# Altium PCB WS2812B.PcbDoc
Units mm, origin at the board's own origin, x right, y up, seen from the top; angles counter-clockwise.
Board outline 100 x 100 mm, 2 copper layers (Top Layer, Bottom Layer); 69 components, 50 nets, 227 pads, 31 vias.
Unrouted connection lines stored in the file: 93.
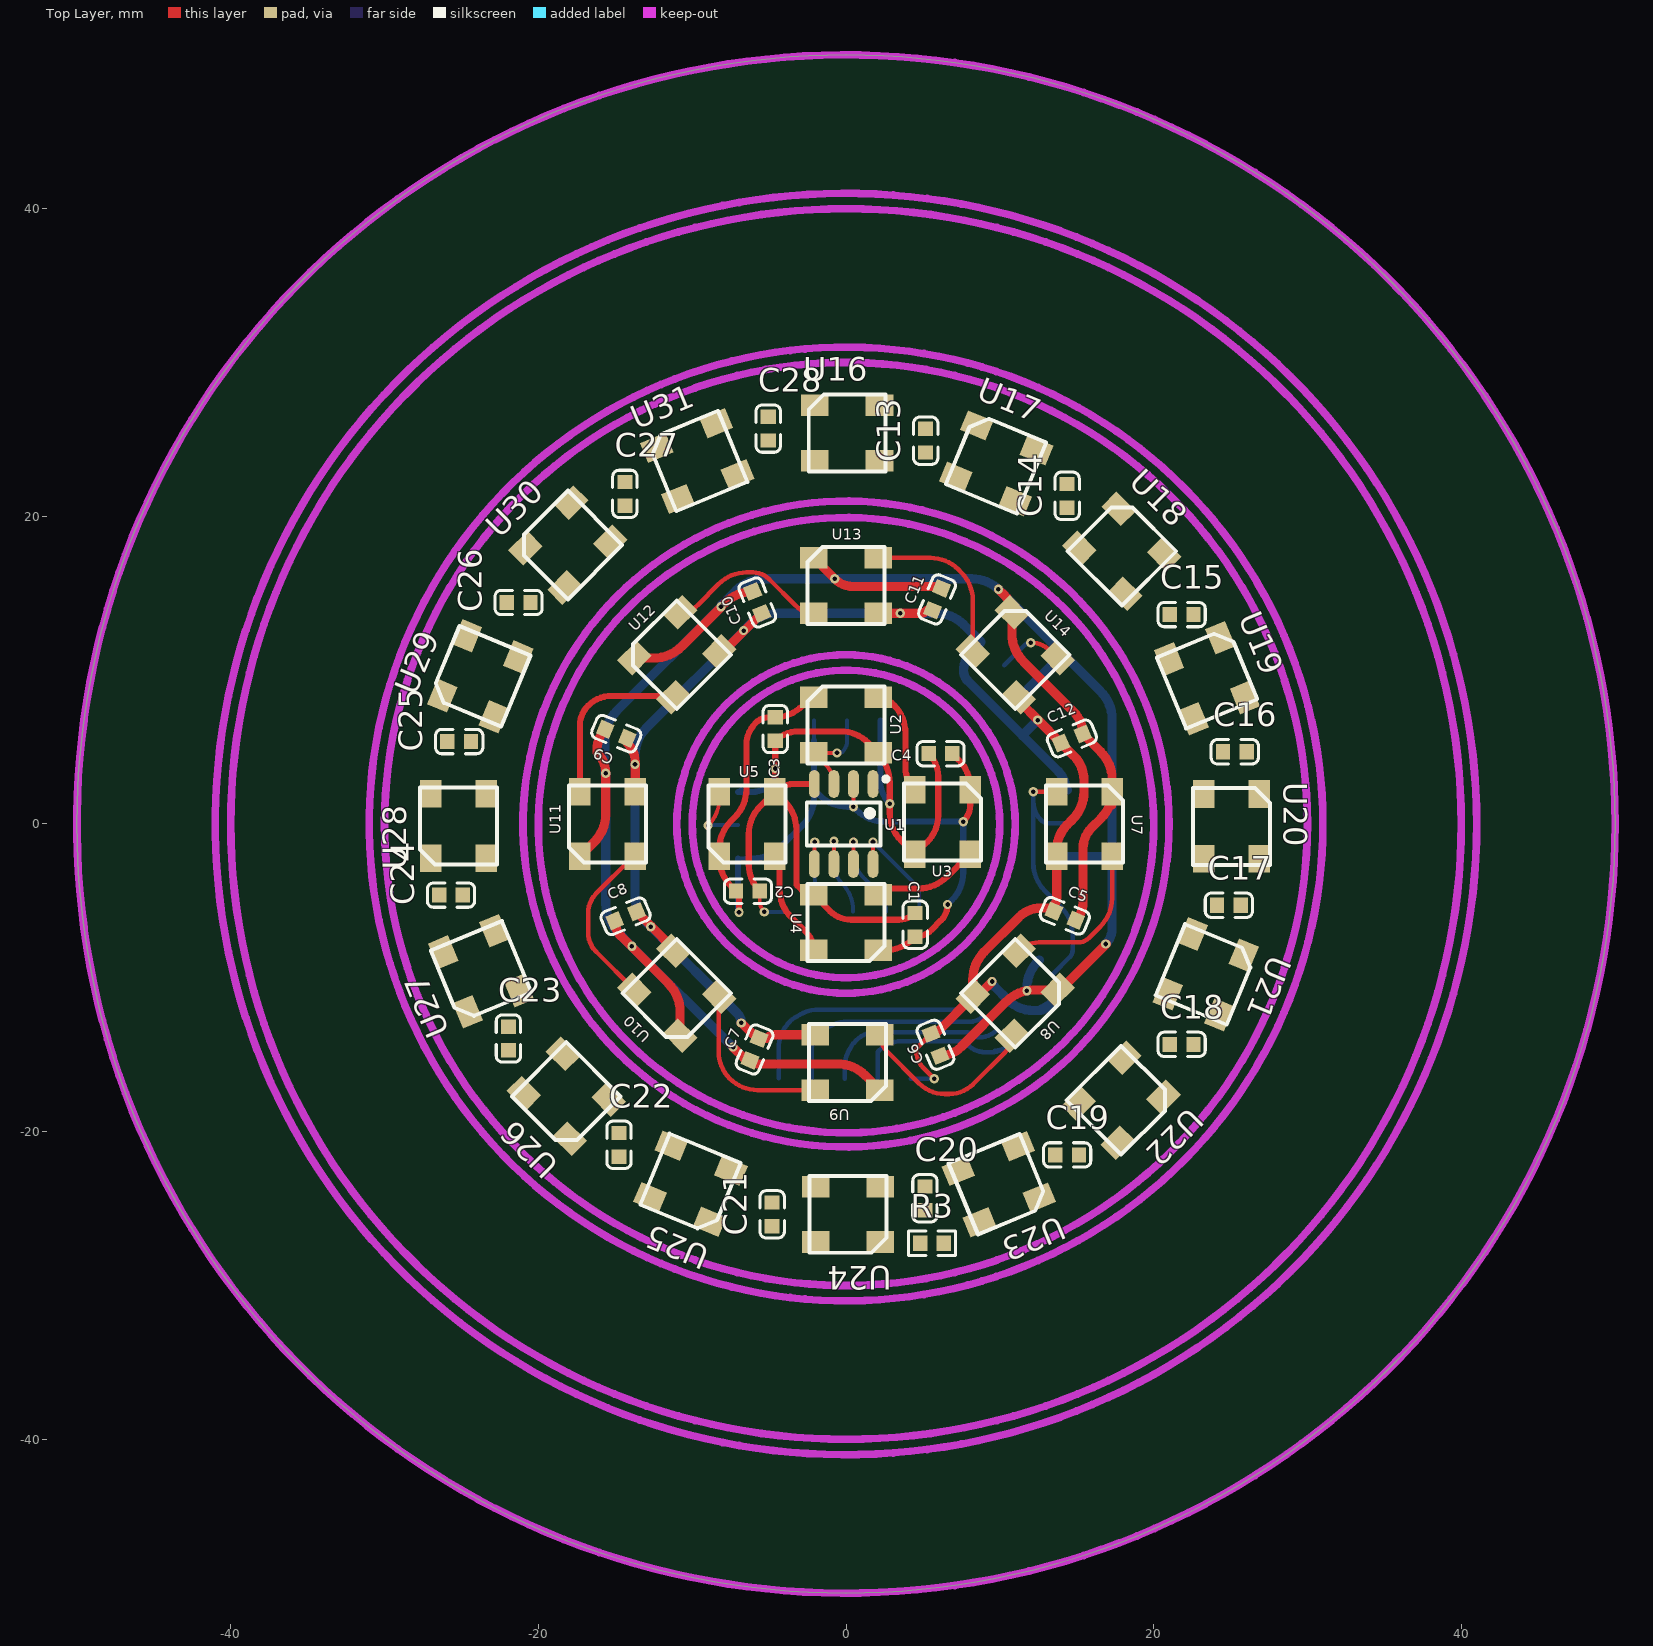
[diagram p0: Top Layer view]
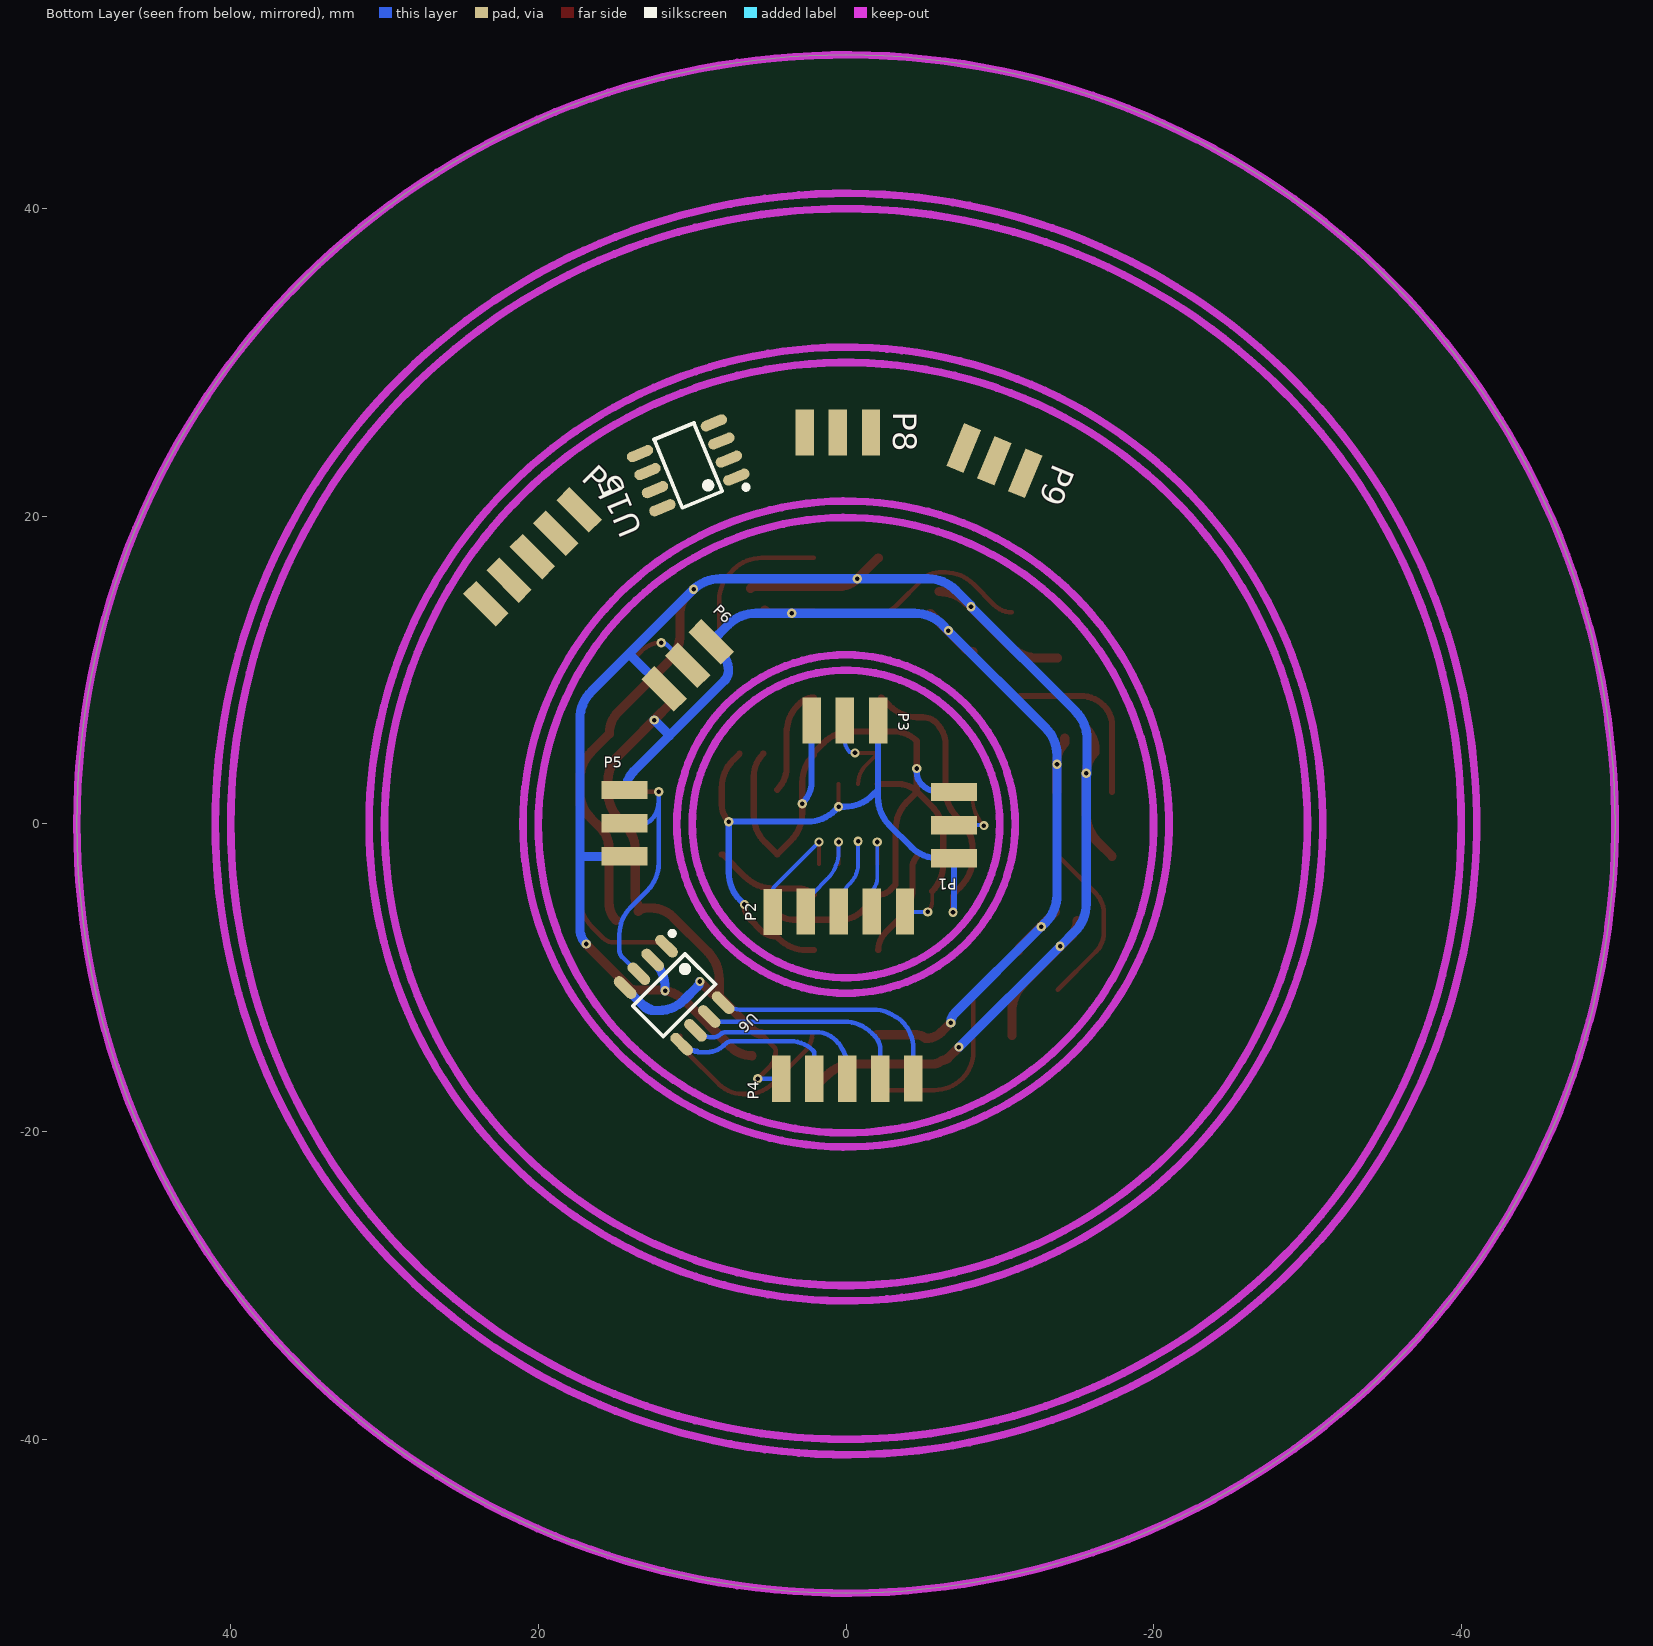
[diagram p1: Bottom Layer view, seen from below]

## Layer stack, top to bottom
Top Solder: solder mask 0.0102, Solder Resist, Dk 3.5
Top Layer: signal copper 0.0356
Dielectric 1: dielectric 0.32, FR-4, Dk 4.8
Bottom Layer: signal copper 0.0356
Bottom Solder: solder mask 0.0102, Solder Resist, Dk 3.5

## Board outline
-50,0 ccw(c0,0) 0,-50 ccw(c0,0) 50,0 ccw(c0,0) 0,50 ccw(c0,0)

## Design rules (kind name [scope] priority, off if disabled: settings)
Clearance [All] p1: gap=0.254
ComponentClearance [All] p1: gap=0 collisioncheckmode=3 verticalgap=0 showdistances=FALSE
PolygonConnect [All] p1: connectstyle=Relief reliefconductorwidth=0.254 reliefentries=4 polygonreliefangle="90 Angle" airgapwidth=0.254
RoutingVias [All] p1: holewidth=0.711 width=1.27 viastyle="Through Hole" minholewidth=0.3 minwidth=0.3 maxholewidth=3 maxwidth=3
SolderMaskExpansion [All] p1: expansion=0.102
UnpouredPolygon [All] p1: allowunpoured=FALSE
Width [All] p1: maxlimit=3 minlimit=0.254 preferedwidth=0.254 minimp=50.000000 maximp=50.000000 favimp=50.000000
28 further rules are at their usual default settings.

## Components (designator, comment, footprint, x,y, rotation, side; value= is the part's Value field where it differs from the comment)
C1 "100nF (104) 10% 50V" 0603_C 4.496,-6.553 r270 top
C2 "100nF (104) 10% 50V" 0603_C -6.375,-4.369 r180 top
C3 "100nF (104) 10% 50V" 0603_C -4.597,6.172 r90 top
C4 "100nF (104) 10% 50V" 0603_C 6.147,4.572 r0 top
C5 "100nF (104) 10% 50V" 0603_C 14.224,-5.969 r337.5 top
C6 "100nF (104) 10% 50V" 0603_C 5.817,-14.351 r292.5 top
C7 "100nF (104) 10% 50V" 0603_C -5.944,-14.656 r247.5 top
C8 "100nF (104) 10% 50V" 0603_C -14.326,-5.994 r202.5 top
C9 "100nF (104) 10% 50V" 0603_C -14.935,5.867 r157.5 top
C10 "100nF (104) 10% 50V" 0603_C -5.766,14.402 r112.5 top
C11 "100nF (104) 10% 50V" 0603_C 5.918,14.605 r67.5 top
C12 "100nF (104) 10% 50V" 0603_C 14.681,5.563 r22.5 top
C13 "100nF (104) 10% 50V" 0603_C 5.182,24.917 r90 top
C14 "100nF (104) 10% 50V" 0603_C 14.376,21.336 r90 top
C15 "100nF (104) 10% 50V" 0603_C 21.819,13.614 r0 top
C16 "100nF (104) 10% 50V" 0603_C 25.273,4.699 r0 top
C17 "100nF (104) 10% 50V" 0603_C 24.892,-5.283 r0 top
C18 "100nF (104) 10% 50V" 0603_C 21.819,-14.326 r0 top
C19 "100nF (104) 10% 50V" 0603_C 14.376,-21.514 r0 top
C20 "100nF (104) 10% 50V" 0603_C 5.131,-24.333 r90 top
C21 "100nF (104) 10% 50V" 0603_C -4.801,-25.375 r90 top
C22 "100nF (104) 10% 50V" 0603_C -14.757,-20.853 r90 top
C23 "100nF (104) 10% 50V" 0603_C -21.946,-13.945 r90 top
C24 "100nF (104) 10% 50V" 0603_C -25.679,-4.623 r180 top
C25 "100nF (104) 10% 50V" 0603_C -25.146,5.359 r180 top
C26 "100nF (104) 10% 50V" 0603_C -21.285,14.402 r180 top
C27 "100nF (104) 10% 50V" 0603_C -14.376,21.463 r90 top
C28 "100nF (104) 10% 50V" 0603_C -5.055,25.705 r90 top
P1 "Header 3" PIN3_SMT -6.985,-2.261 r0 bottom
P2 "Header 5" PIN5_SMT -3.835,-5.69 r270 bottom
P3 "Header 3" PIN3_SMT -2.108,6.706 r270 bottom
P4 "Header 5" PIN5_SMT 4.216,-16.561 r90 bottom
P5 "Header 3" PIN3_SMT 14.376,2.235 r180 bottom
P6 "Header 3" PIN3_SMT 8.738,11.836 r225 bottom
P7 "Header 5" PIN5_SMT 17.348,20.422 r225 bottom
P8 "Header 3" PIN3_SMT -1.651,25.425 r270 bottom
P9 "Header 3" PIN3_SMT -11.659,22.758 r292.5 bottom
R3 "0Ω (0R0) ±1%" 0603_R 5.588,-27.254 r0 top
U1 "STC8F1K08S2" SOP-8_150mil -0.152,0 r180 top
U2 "WS2812B_5050R" SW2812B_5050RGB 0,6.426 r0 top
U3 "WS2812B_5050R" SW2812B_5050RGB 6.274,0.127 r270 top
U4 "WS2812B_5050R" SW2812B_5050RGB 0,-6.401 r180 top
U5 "WS2812B_5050R" SW2812B_5050RGB -6.426,0 r90 top
U6 "STC8F1K08S2" SOP-8_150mil 11.176,-11.125 r315 bottom
U7 "WS2812B_5050R" SW2812B_5050RGB 15.5,0 r270 top
U8 "WS2812B_5050R" SW2812B_5050RGB 11,-11 r225 top
U9 "WS2812B_5050R" SW2812B_5050RGB 0.102,-15.5 r180 top
U10 "WS2812B_5050R" SW2812B_5050RGB -11,-11 r135 top
U11 "WS2812B_5050R" SW2812B_5050RGB -15.5,0 r90 top
U12 "WS2812B_5050R" SW2812B_5050RGB -11,11 r45 top
U13 "WS2812B_5050R" SW2812B_5050RGB 0,15.5 r0 top
U14 "WS2812B_5050R" SW2812B_5050RGB 11,11 r315 top
U15 "STC8F1K08S2" SOP-8_150mil 10.262,23.317 r67.5 bottom
U16 "WS2812B_5050R" SW2812B_5050RGB 0.076,25.425 r0 top
U17 "WS2812B_5050R" SW2812B_5050RGB 9.754,23.444 r337.5 top
U18 "WS2812B_5050R" SW2812B_5050RGB 17.932,17.729 r315 top
U19 "WS2812B_5050R" SW2812B_5050RGB 23.47,9.474 r292.5 top
U20 "WS2812B_5050R" SW2812B_5050RGB 25.07,-0.152 r270 top
U21 "WS2812B_5050R" SW2812B_5050RGB 23.393,-9.779 r247.5 top
U22 "WS2812B_5050R" SW2812B_5050RGB 17.882,-17.958 r225 top
U23 "WS2812B_5050R" SW2812B_5050RGB 9.931,-23.419 r202.5 top
U24 "WS2812B_5050R" SW2812B_5050RGB 0.127,-25.375 r180 top
U25 "WS2812B_5050R" SW2812B_5050RGB -10.109,-23.393 r157.5 top
U26 "WS2812B_5050R" SW2812B_5050RGB -18.186,-17.704 r135 top
U27 "WS2812B_5050R" SW2812B_5050RGB -23.724,-9.576 r112.5 top
U28 "WS2812B_5050R" SW2812B_5050RGB -25.197,-0.127 r90 top
U29 "WS2812B_5050R" SW2812B_5050RGB -23.774,9.601 r67.5 top
U30 "WS2812B_5050R" SW2812B_5050RGB -18.085,18.136 r45 top
U31 "WS2812B_5050R" SW2812B_5050RGB -9.677,23.597 r22.5 top

## Footprints (in the part's own frame and the unit in brackets; to place one, negate y for a bottom-side part, rotate by r counter-clockwise, add the part's x,y. Pads: shape width x height; smd on the part's side, far side on the other; paste and mask are expansions set on the pad)
0603_C [mm]
  rect 0.93x0.98 smd: 1(-0.77,0) 2(0.77,0)
  silkscreen extent -1.53,-0.79 1.54,0.79, body extent -0.8,-0.4 0.8,0.4, height 0.3
0603_R [mm]
  rect 0.93x0.98 smd: 1(-0.77,0) 2(0.77,0)
  silkscreen extent -1.53,-0.79 1.54,0.79, body extent -0.85,-0.4 0.85,0.4, height 0.56
PIN3_SMT [mm]
  rect 3x1.2 smd: 1(-0.025,-0.025) 2(-0.025,-2.183) 3(-0.025,-4.342)
PIN5_SMT [mm]
  rect 3x1.2 smd: 1(0,0) 2(0,-2.15) 3(0,-4.3) 4(0,-6.45) 5(0.025,-8.6)
SOP-8_150mil [mm]
  oval 0.7x1.8 smd: 1(-1.905,-2.6) 2(-0.635,-2.6) 3(0.635,-2.6) 4(1.905,-2.6) 5(1.905,2.6) 6(0.635,2.6) 7(-0.635,2.6) 8(-1.905,2.6)
  silkscreen extent -2.9,-3.07 2.4,1.4, body extent -2.5,-3.1 2.5,3.1, height 1.75
SW2812B_5050RGB [mm]
  rect 1.8x1.4 smd: 1(-2.1,1.8) 2(-2.1,-1.8) 3(2.1,-1.8) 4(2.1,1.8)
  silkscreen extent -2.5,-2.5 2.5,2.5

## Part data
C1 C2 C3 C4 C5 C6 C7 C8 C9 C10 C11 C12 C13 C14 C15 C16 C17 C18 C19 C20 C21 C22 C23 C24 C25 C26 C27 C28: library part "0603 100nF (104) 10% 50V", "贴片电容"
P1 P3 P5 P6 P8 P9: "Header, 3-Pin"
P2 P4 P7: "Header, 5-Pin"
R3: library part "0603 0Ω (0R0) 1%", "贴片电阻"
U1 U6 U15: library part STC8F1K08S2_SOP8
U2 U3 U4 U5 U7 U8 U9 U10 U11 U12 U13 U14 U16 U17 U18 U19 U20 U21 U22 U23 U24 U25 U26 U27 U28 U29 U30 U31: library part WS2812B_5050RGB

## Via types
v1: diameter 0.6, hole 0.3, Top Layer to Bottom Layer, tented both sides, 31 vias

## Nets (pads, with @x,y where several pads share a name; then routed paths per layer and width w, separated by ;. In a path a pad name is that pad's centre, name@x,y a point inside that pad or via, vN(x,y) a via of type N, cw(c..) or ccw(c..) an arc to the next point about the centre after c; other vN are vias at no path point)
D2_2: R3.1 U15.1 U24.2
GND: C1.1 C2.1 C3.1 C4.1 P1.3 P2.1 P3.3 U1.4 U2.3 U3.3 U4.3 U5.3 | length 62.7
  Top Layer w0.254: C2.1 -5.605,-4.998 ccw(c-4.592,-4.998) v1(-5.309,-5.715)
  Top Layer w0.4: C2.1 cw(c-3.869,-2.632) -6.325,-2.632 -6.325,-0.651 cw(c-3.785,-0.651) -5.581,1.146 U5.3 ; U1.4 -3.419,2.6 ccw(c-3.419,0.893) U5.3 ; U2.3@2.1,4.496 U2.3 1.45,5.276 ccw(c-0.346,3.48) -0.346,6.02 -3.106,6.02 ccw(c-3.106,3.911) C3.1 v1(-4.597,3.607) -4.597,2.17 cw(c-4.696,2.17) U5.3 ; U2.3@2.101,4.495 cw(c0.305,2.699) 2.845,2.699 v1(2.845,1.321) 2.845,0.708 ccw(c5.385,0.708) 3.589,-1.088 U3.3 5.28,-1.167 ccw(c3.553,0.559) 5.994,0.559 5.994,3.081 ccw(c3.886,3.081) C4.1 ; C1.1 cw(c3.434,-4.721) 3.434,-6.223 0.33,-6.223 cw(c0.33,-4.272) -1.049,-5.652 U4.3 cw(c-2.1,-3.485) -2.889,-4.274 -3.15,-4.013 cw(c-2.966,-3.829) -3.226,-3.829 -3.226,-0.353 ccw(c-5.766,-0.353) -3.97,1.444 U5.3
  Bottom Layer w0.254: P1.3 P1.3@-6.818,2.273 ; v1(-5.309,-5.715) -3.897,-5.715 ccw(c-3.897,-5.628) P2.1 ; P3.3 P3.3@2.253,6.711 ; v1(2.845,1.321) 2.91,1.386 cw(c2.997,1.3) v1@2.997,1.422
  Bottom Layer w0.4: P1.3 -6.097,2.081 ccw(c-6.097,3.735) -4.928,2.565 ccw(c-5.725,3.363) -4.597,3.363 v1(-4.597,3.607) ; P3.3 2.233,2.797 ccw(c4.321,2.797) v1(2.845,1.321)
GND1: C5.1 C6.1 C7.1 C8.1 C9.1 C10.1 C11.1 C12.1 P4.1 P5.1 P6.1 U6.4 U7.3 U8.3 U9.3 U10.3 U11.3 U12.3 U13.3 U14.3 | length 123.8
  Top Layer w0.3: 4.691,-14.471 ccw(c4.977,-14.757) 4.572,-14.757 ccw(c6.105,-14.757) 5.021,-15.841 v1(5.74,-16.561) ; 4.691,-14.471 C6.1
  Top Layer w0.6: C9.1 -14.224,5.275 cw(c-15.488,4.01) v1@-13.7,4.01 ; U11.3 v1@-13.7,3.886 ; C8.1 v1@-12.667,-6.647 ; v1(-12.7,-6.68) v1@-12.667,-6.647 ; U10.3 ccw(c-11.551,-8.242) -11.311,-8.002 v1@-12.667,-6.647 ; U12.3 ccw(c-8.242,11.919) U12.3@-7.743,11.419 ; U12.3@-7.742,11.419 C10.1 ; v1(-6.807,-12.929) -6.228,-13.508 ccw(c-5.173,-12.452) -5.173,-13.944 cw(c-4.583,-14.534) -4.583,-13.7 U9.3 ; U13.3 v1(3.531,13.7) 4.808,13.7 ccw(c4.808,14.361) C11.1@5.275,13.894 ; C6.1 ccw(c5.522,-12.933) 6.022,-13.433 U8.3 ; v1(9.5,-10.236) 8.723,-11.013 cw(c8.242,-10.533) U8.3 ; U14.3 ccw(c11.735,8.242) 11.365,7.872 v1@12.476,6.761 ; v1(12.471,6.756) v1@12.476,6.761 ; C5.1 ccw(c12.998,-6.189) 12.998,-5.461 12.675,-5.461 ccw(c12.675,-7.485) 11.244,-6.054 8.986,-8.311 ccw(c10.782,-10.107) 8.242,-10.107 U8.3 ; C5.1@13.513,-5.275 ccw(c13.06,-4.823) 13.7,-4.823 U7.3 13.7,-1.684 cw(c16.009,-1.684) 14.376,-0.051 14.725,0.297 ccw(c12.929,2.094) 15.469,2.094 15.469,2.845 ccw(c13.237,2.845) 14.815,4.423 C12.1 v1@12.476,6.761
  Bottom Layer w0.3: P4.1 v1(5.74,-16.561)
  Bottom Layer w0.6: v1(-6.807,-12.929) ccw(c-7.666,-12.929) -7.059,-12.322 v1(-12.7,-6.68) -12.972,-6.408 cw(c-11.176,-4.612) -13.716,-4.612 v1(-13.716,3.886) -13.716,4.46 cw(c-11.176,4.46) -12.972,6.256 v1(-6.655,12.573) -6.272,12.956 cw(c-4.476,11.16) -4.476,13.7 v1(3.531,13.7) 5.857,13.7 cw(c5.857,11.16) 7.653,12.956 P6.1 8.177,11.241 ccw(c9.461,9.957) 7.645,9.957 ccw(c8.565,9.957) 7.915,9.306 11.481,5.74 ; 10.528,-11.443 9.669,-10.583 ; 10.529,-11.443 ccw(c12.186,-9.785) 12.186,-12.129 12.503,-12.129 ; v1(12.471,6.756) 11.499,5.784 ccw(c11.542,5.74) 11.481,5.74 ; U6.4 13.471,-11.524 ; P5.1 14.3,2.21 ccw(c12.584,2.21) 13.798,3.424 11.481,5.74 ; 9.669,-10.583 cw(c10.016,-10.236) 9.525,-10.236 ccw(c10.016,-10.236) 9.669,-10.583 ; 12.503,-12.129 ccw(c12.503,-11.254) 13.122,-11.873 13.471,-11.524 ; 12.503,-12.129 ccw(c11.675,-9.728) 13.471,-11.524
GND2: C13.1 C14.1 C15.1 C16.1 C17.1 C18.1 C19.1 C20.1 C21.1 C22.1 C23.1 C24.1 C25.1 C26.1 C27.1 C28.1 P7.1 P8.1 P9.1 U15.4 U16.3 U17.3 U18.3 U19.3 U20.3 U21.3 U22.3 U23.3 U24.3 U25.3 U26.3 U27.3 U28.3 U29.3 U30.3 U31.3
NetP1_2: P1.2 U5.4 | length 4.4
  Top Layer w0.254: v1(-8.966,-0.102) ccw(c-10.753,1.685) -8.226,1.685 U5.4
  Bottom Layer w0.254: v1(-8.966,-0.102) cw(c-8.907,-0.16) -8.907,-0.077 P1.2
NetP3_2: P3.2 U1.3 U2.2 | length 6.5
  Top Layer w0.254: U2.2 U2.2@-2.097,4.623 ; U1.3 ccw(c-2.51,2.6) -1.292,3.818 U2.2@-2.097,4.623 ; v1(-0.584,4.623) U2.2@-2.097,4.623
  Bottom Layer w0.254: v1(-0.584,4.623) -0.453,4.623 ccw(c-0.453,4.796) -0.33,4.674 -0.29,4.674 ccw(c-0.29,4.76) -0.229,4.699 ccw(c-0.962,5.432) 0.075,5.432 P3.2
NetP5_2: P5.2 U6.3 U7.2 | length 17.8
  Top Layer w0.3: v1(12.175,2.1) U7.2
  Bottom Layer w0.3: v1(12.175,2.1) 12.175,1.461 ; U6.3 14.528,-8.671 ccw(c14.036,-8.179) 14.732,-8.179 14.732,-7.189 ccw(c12.217,-7.189) 13.995,-5.41 12.919,-4.334 cw(c14.715,-2.537) 12.175,-2.537 12.175,1.461 ; P5.2 13.163,0.052 cw(c13.163,0.742) 12.675,0.254 cw(c13.881,1.461) 12.175,1.461
NetP6_2: P6.2 U14.4 | length 4.4
  Top Layer w0.3: v1(12.014,11.786) cw(c12.014,9.985) 13.287,11.258 U14.4
  Bottom Layer w0.3: P6.2 11.605,11.616 cw(c12.014,11.207) v1(12.014,11.786)
NetP8_2: P8.2 U15.3 U16.2
NetP9_2: P9.2 U31.4
NetR3_2: R3.2 U23.4
NetU2_4: U2.4 U3.2 | length 7
  Top Layer w0.4: U2.4 cw(c2.1,6.972) 2.987,7.859 3.117,7.729 cw(c1.321,5.933) 3.861,5.933 3.861,3.707 ccw(c5.954,3.707) U3.2
NetU3_4: U3.4 U4.2 | length 7
  Top Layer w0.254: U4.2 U4.2@2.198,-4.503
  Top Layer w0.4: U4.2 cw(c3.089,-5.59) 3.089,-4.191 4.739,-4.191 ccw(c4.739,-1.651) 6.535,-3.447 U3.4@7.964,-2.019 ; U3.4@7.964,-2.018 cw(c8.074,-2.129) U3.4
NetU4_4: U4.4 U5.2 | length 6.9
  Top Layer w0.4: U5.2 cw(c-5.37,-2.844) -4.318,-2.844 -4.318,-4.256 ccw(c-1.778,-4.256) -3.574,-6.053 -2.577,-7.05 ; -2.576,-7.05 cw(c-3.728,-8.201) U4.4
NetU7_4: U7.4 U8.2 | length 10.6
  Top Layer w0.3: U8.2 cw(c12.53,-9.561) 12.53,-7.696 15.099,-7.696 ccw(c15.099,-6.742) 15.773,-7.417 16.556,-6.634 ccw(c14.76,-4.838) 17.3,-4.838 U7.4
NetU8_4: U8.4 U9.2 | length 12.2
  Top Layer w0.3: U9.2 ccw(c3.654,-13.7) 2.627,-14.727 4.775,-16.875 ccw(c6.408,-15.242) 6.408,-17.551 6.706,-17.551 ccw(c6.706,-15.344) 8.267,-16.905 10.345,-14.826 ccw(c9.277,-13.758) U8.4
NetU9_4: U9.4 U10.2 | length 13.3
  Top Layer w0.3: U10.2 ccw(c-8.15,-11.304) -8.28,-11.304 -8.28,-14.789 ccw(c-5.782,-14.789) -7.55,-16.555 ; U9.4 -5.752,-17.3 ; -7.55,-16.555 ccw(c-5.782,-14.789) -7.549,-16.556 ; -7.55,-16.555 -7.549,-16.556 ; -7.549,-16.556 ccw(c-5.753,-14.76) -5.753,-17.3 ; -7.549,-16.556 ccw(c-5.752,-14.76) -5.752,-17.3
NetU10_4: U10.4 U11.2 | length 11.1
  Top Layer w0.3: U10.4 -16.255,-8.291 cw(c-15.025,-7.061) -16.764,-7.061 -16.764,-5.773 cw(c-15.03,-5.773) -16.256,-4.547 -13.887,-2.177 cw(c-13.7,-2.364) U11.2
NetU11_4: U11.4 U12.2 | length 11.5
  Top Layer w0.4: U11.4 -17.3,6.402 cw(c-15.47,6.402) -16.764,7.696 cw(c-15.231,6.163) -15.231,8.331 -11.427,8.331 cw(c-11.427,8.028) U12.2
NetU12_4: U12.4 U13.2 | length 10.6
  Top Layer w0.3: U12.4 ccw(c-10.788,15.374) -9.645,14.231 -8.262,15.614 cw(c-6.466,13.818) -6.466,16.358 -6.046,16.358 cw(c-6.046,14.883) -5.004,15.926 -3.257,14.179 ccw(c-2.1,15.337) U13.2
NetU13_4: U13.4 U14.2 | length 11
  Top Layer w0.3: U13.4 5.498,17.3 cw(c5.498,14.76) 7.295,16.556 7.498,16.352 cw(c5.702,14.556) 8.001,15.637 cw(c5.702,14.556) 8.242,14.556 U14.2
NetU16_4: U16.4 U17.2
NetU17_4: U17.4 U18.2
NetU18_4: U18.4 U19.2
NetU19_4: U19.4 U20.2
NetU20_4: U20.4 U21.2
NetU21_4: U21.4 U22.2
NetU22_4: U22.4 U23.2
NetU24_4: U24.4 U25.2
NetU25_4: U25.4 U26.2
NetU26_4: U26.4 U27.2
NetU27_4: U27.4 U28.2
NetU28_4: U28.4 U29.2
NetU29_4: U29.4 U30.2
NetU30_4: U30.4 U31.2
RXD: P2.2 U1.5 | length 4.7
  Top Layer w0.254: U1.5 -2.057,-1.23 cw(c-1.971,-1.23) v1(-2.032,-1.168)
  Bottom Layer w0.254: v1(-2.032,-1.168) -2.032,-3.507 ccw(c-0.849,-3.507) P2.2@-1.685,-4.343
RXD1: P4.2 U6.5 | length 12
  Bottom Layer w0.3: P4.2 2.066,-14.894 cw(c2.296,-14.894) 2.134,-14.732 cw(c3.605,-16.204) 3.605,-14.122 7.455,-14.122 cw(c7.455,-14.643) 7.823,-14.275 7.915,-14.367 ccw(c9.042,-13.239) 8.179,-14.58 ccw(c9.042,-13.239) 9.042,-14.834 9.422,-14.834 ccw(c9.422,-13.048) U6.5 cw(c9.667,-13.294) 9.667,-14.732
RXD2: P7.2 U15.5
SCL: P2.4 U1.7 | length 7
  Top Layer w0.254: U1.7 v1(0.483,-1.168) ; v1(0.483,-1.168) ccw(c0.421,-1.107) 0.508,-1.107 0.508,-1.016 ccw(c0.569,-1.077) 0.483,-1.077 v1(0.483,-1.168)
  Bottom Layer w0.254: v1(0.483,-1.168) 0.483,-1.793 ccw(c3.023,-1.793) 1.227,-3.589 2.111,-4.473 cw(c0.894,-5.69) P2.4
SCL1: P4.4 U6.7 | length 14
  Bottom Layer w0.3: P4.4 -2.234,-14.683 cw(c-0.938,-14.683) -1.854,-13.767 -1.684,-13.596 cw(c0.112,-15.392) 0.112,-12.852 8.073,-12.852 ccw(c8.073,-11.699) U6.7
SCL2: P7.4 U15.7
SDA: P2.5 U1.8 | length 7.2
  Top Layer w0.254: U1.8 v1(1.753,-1.168)
  Bottom Layer w0.254: v1(1.753,-1.168) 4.649,-4.065 cw(c4.371,-4.343) 4.765,-4.343 P2.5
SDA1: P4.5 U6.8 | length 15.8
  Bottom Layer w0.3: P4.5 -4.384,-14.631 cw(c-1.844,-14.631) -3.952,-13.215 cw(c-1.844,-14.631) -3.64,-12.834 -3.607,-12.802 cw(c-2.626,-13.783) -3.202,-12.521 cw(c-1.751,-14.605) -1.751,-12.065 4.29,-12.065 6.908,-12.065 ccw(c6.908,-10.534) U6.8
SDA2: P7.5 U15.8
TXD: P2.3 U1.6 | length 6.4
  Top Layer w0.254: U1.6 v1(-0.787,-1.118)
  Bottom Layer w0.254: v1(-0.787,-1.118) -0.787,-2.609 ccw(c0.947,-2.609) -0.279,-3.835 cw(c-2.075,-5.632) 0.465,-5.632 P2.3
TXD1: P4.3 U6.6 | length 12.2
  Bottom Layer w0.3: P4.3 -0.084,-15.86 cw(c2.456,-15.86) 0.66,-14.064 ; 0.661,-14.063 cw(c1.929,-15.331) 1.929,-13.538 7.847,-13.538 cw(c7.847,-13.972) 8.153,-13.665 ccw(c8.644,-13.175) 8.644,-13.868 8.686,-13.868 ccw(c8.686,-12.313) U6.6
TXD2: P7.3 U15.6
VCC: C1.2 C2.2 C3.2 C4.2 P1.1 P3.1 U1.2 U2.1 U3.1 U4.1 U5.1 | length 61.9
  Top Layer w0.254: U2.1@-2.388,8.099 U2.1@-2.151,8.099 ; v1(0.483,1.118) 0.483,1.016 U1.2
  Top Layer w0.4: U5.1@-8.226,-1.582 U5.1@-8.226,-1.395 ; v1(-6.96,-5.74) -6.96,-4.817 ccw(c-7.594,-4.817) C2.2 -7.482,-4.032 cw(c-5.686,-2.236) -8.226,-2.236 U5.1 -8.226,-1.608 cw(c-5.686,-1.608) -7.482,0.189 -7.221,0.45 ccw(c-9.017,2.246) -6.477,2.246 -6.477,5.107 cw(c-4.396,5.107) -5.867,6.579 cw(c-4.99,5.701) -4.99,6.942 -4.628,6.942 ccw(c-4.628,9.482) C3.2 ccw(c-4.628,9.482) -2.832,7.686 U2.1@-2.292,8.226 ; U4.1 2.566,-8.201 ccw(c2.566,-5.661) 4.362,-7.457 C1.2 ccw(c4.496,-5.809) 5.566,-6.88 6.173,-6.273 ccw(c5.132,-5.232) 6.477,-5.83 ccw(c5.132,-5.232) v1(6.604,-5.232) ; C4.2 7.33,4.159 cw(c5.534,2.363) 8.074,2.363 U3.1 8.074,1.248 cw(c6.524,1.248) v1(7.62,0.152)
  Bottom Layer w0.254: P1.1 P1.1@-6.477,-2.236 ; P3.1@-2.083,5.423 P3.1
  Bottom Layer w0.4: P1.1 -7.01,-5.619 ccw(c-6.838,-5.619) v1(-6.96,-5.74) ; P1.1@-6.477,-2.236 -6.031,-2.236 ccw(c-6.031,0.304) -4.235,-1.492 -2.827,-0.084 ccw(c-4.623,1.712) -2.083,1.712 -2.083,2.235 ; P3.1@-2.083,5.423 -2.083,2.235 ; v1(6.604,-5.232) 6.876,-4.96 ccw(c5.08,-3.164) 7.62,-3.164 v1(7.62,0.152) 2.5,0.152 cw(c2.5,2.692) 0.704,0.896 v1(0.483,1.118) 0.087,1.118 cw(c0.087,3.658) -1.71,1.862 -2.083,2.235
VCC1: C5.2 C6.2 C7.2 C8.2 C9.2 C10.2 C11.2 C12.2 P5.3 P6.3 U6.2 U7.1 U8.1 U9.1 U10.1 U11.1 U12.1 U13.1 U14.1 | length 174.5
  Top Layer w0.6: U11.1 -16.365,-1.165 ccw(c-18.161,0.631) -15.621,0.631 v1(-15.621,3.299) ccw(c-17.529,3.299) -16.18,4.648 -16.18,4.875 cw(c-14.359,4.875) C9.2 ; C8.2 ccw(c-13.603,-6.289) -14.617,-7.303 -11.532,-10.388 cw(c-13.328,-12.184) -10.788,-12.184 U10.1 ; U12.1 -12.489,10.788 ccw(c-12.489,13.328) -10.693,11.532 v1@-8.115,14.11 ; -7.855,14.37 cw(c-6.06,12.575) C10.2 ; v1(-7.341,-14.503) C7.2@-6.645,-15.199 ; C7.2@-6.645,-15.199 ccw(c-6.238,-14.791) C7.2 ccw(c-5.687,-14.816) -5.687,-15.596 -0.555,-15.596 cw(c-0.555,-18.136) 1.241,-16.34 U9.1 ; U13.1 v1(-0.738,15.938) ccw(c0.457,17.134) 0.457,15.443 5.907,15.443 cw(c5.907,15.01) C11.2 ; C6.2 ccw(c6.111,-13.137) 7.472,-14.499 10.439,-11.532 cw(c12.235,-13.328) 12.235,-10.788 U8.1 ccw(c13.758,-10.381) 14.046,-10.669 16.916,-7.798 v1(16.891,-7.798) ; v1(9.906,15.265) 10.345,14.826 cw(c9.277,13.758) U14.1 10.788,12.362 ccw(c13.328,12.362) 11.532,10.566 14.793,7.305 cw(c13.345,5.857) C12.2 16.556,4.694 cw(c14.76,2.898) 17.3,2.898 U7.1 ; C5.2 ccw(c13.794,-5.122) 15.408,-5.122 15.408,-1.603 cw(c17.355,-1.603) 15.978,-0.227 16.589,0.384 ccw(c14.873,2.1) U7.1 ; U7.1@17.3,1.248 U7.1
  Bottom Layer w0.6: v1(-7.341,-14.503) cw(c-7.341,-14.442) -7.384,-14.485 v1(-13.919,-7.95) -14.877,-6.992 cw(c-13.081,-5.196) -15.621,-5.196 v1(-15.621,3.299) -15.624,3.299 -15.672,3.251 -15.672,5.526 cw(c-13.132,5.526) -14.928,7.323 v1(-8.128,14.122) -8.128,14.163 cw(c-8.041,14.163) -8.103,14.224 -7.132,15.194 cw(c-5.336,13.398) -5.336,15.938 v1(-0.738,15.938) 8.181,15.938 cw(c8.181,13.398) 9.977,15.194 14.08,11.091 ; v1(11.76,-10.846) 11.76,-10.695 cw(c14.3,-10.695) 12.504,-8.899 U6.2 ; P6.3 14.043,11.002 ccw(c13.954,11.091) 14.08,11.091 ; P5.3 17.221,-2.106 ; v1(16.891,-7.798) ccw(c15.91,-6.817) 17.297,-6.817 17.297,6.822 ccw(c14.757,6.822) 16.553,8.618 14.08,11.091
VCC2: C13.2 C14.2 C15.2 C16.2 C17.2 C18.2 C19.2 C20.2 C21.2 C22.2 C23.2 C24.2 C25.2 C26.2 C27.2 C28.2 P8.3 P9.3 U15.2 U16.1 U17.1 U18.1 U19.1 U20.1 U21.1 U22.1 U23.1 U24.1 U25.1 U26.1 U27.1 U28.1 U29.1 U30.1 U31.1
pads on no net: U1.1 U6.1

## Keep-outs
Keep-Out Layer:
  circle w0.5: c0,0 r40
  circle w0.5: c0,0 r31
  circle w0.5: c0,0 r30
  circle w0.5: c0,0 r41
  circle w0.5: c0,0 r50
  circle w0.5: c0,0 r10
  circle w0.5: c0,0 r11
  circle w0.5: c0,0 r21
  circle w0.5: c0,-0.076 r20